# EAGLE board Circuito Irrigação (EAGLE 9.7.0)

Size 144.95 x 92.45 mm. Coordinates in mm from the lower left corner, seen from the top.
Outline: 0,0 144.95,0 144.95,92.45 0,92.45 0,0
Copper layers (1*16): Top 0.035mm / dielectric 1.5mm / Bottom 0.035mm
Design rules "default": minimum track width 6mil, minimum drill 0.35mm, track to track 6mil, track to pad 6mil, pad to pad 6mil, via to via 6mil, smd to smd 6mil, copper to edge 40mil, drill to drill 6mil, minimum pad ring 10mil, minimum via ring 8mil, stop-mask expansion 4mil, vias tented up to drill 0mil, thermal gap 10mil

## Footprints (pad centres in the part's own frame; a part is rotated, then mirrored left to right if it is on the bottom)
BATTERY-GENERIC = drill 1.118 pad 3.15 octagon: + 2.54,0; - -2.54,0
LEDRD254W60D565H860B_G = drill 0.981 pad 1.581: 1 -1.27,0; 2 1.27,0
LU-5-R = drill 0.8: 1 -6.35,-3.81; 5 3.81,-3.81; 6 6.35,-3.81; 7 6.35,3.81; 8 3.81,3.81; 12 -6.35,3.81
MOTOR = drill 1.118 pad 3.15 octagon: + 2.54,0; - -2.54,0
RESAD1016W63L850D250B = drill 0.83 pad 1.43: 1 -5.08,0; 2 5.08,0
SEN-13322 = drill 1.016 long: 1 -2.54,0; 2 0,0; 3 2.54,0
TO92 = drill 0.813 octagon: 1 -1.27,0; 2 0,1.905; 3 1.27,0
ARDUINO-UNO-R3-SHIELD = drill 1.016 pad 1.88: 3.3V 24.13,-2.54; 5V 24.13,0; A0 24.13,12.7; A1 24.13,15.24; A2 24.13,17.78; A3 24.13,20.32; A4 24.13,22.86; A5 24.13,25.4; AREF -24.13,-13.97; D2 -24.13,20.32; D3 -24.13,17.78; D4 -24.13,15.24; D5 -24.13,12.7; D6 -24.13,10.16; D7 -24.13,7.62; D8 -24.13,3.81; D9 -24.13,1.27; D10 -24.13,-1.27; D11 -24.13,-3.81; D12 -24.13,-6.35; D13 -24.13,-8.89; GND@0 24.13,2.54; GND@1 24.13,5.08; GND@2 -24.13,-11.43; IOREF 24.13,-7.62; NC 24.13,-10.16; RES 24.13,-5.08; RX -24.13,25.4; SCL -24.13,-19.05; SDA -24.13,-16.51; TX -24.13,22.86; VIN 24.13,7.62

## Placement (x,y rotation side)
BAT1  9V  [BATTERY-GENERIC]  71.96,84.19 90 top
D1  GREEN  [LEDRD254W60D565H860B_G]  114.54,54.58 270 top
K1  RELAY-SPDT_LU-5-R  [LU-5-R]  101.03,56.4 180 top
M2  MOTOR_HDR  [MOTOR]  136.7,64.41 180 top
R1  1k  [RESAD1016W63L850D250B]  82.13,67.21 0 top
R2  1k  [RESAD1016W63L850D250B]  106.33,47.79 180 top
SEN1  SEN-13322  [SEN-13322]  85.21,6.99 90 top
T1  NPN  [TO92]  87.24,58.03 120 top
U1  ARDUINO-UNO-R3-SHIELD  [ARDUINO-UNO-R3-SHIELD]  47.88,38.19 270 top

## Library data of the parts
BAT1 K1 M2 R1 R2 SEN1 U1 = Tinkercad
D1 = Tinkercad; CATEGORY: Opto-Electronic; SUB-CATEGORY: LED; VALUE: LED_GREEN
T1 = Tinkercad; CATEGORY: Transistor; SUB-CATEGORY: BJT; TYPE: NPN

## Nets
BAT1+: BAT1.+ D1.1 K1.1 K1.5
BAT1-: BAT1.- M2.- SEN1.2 T1.3 U1.GND@0 U1.GND@1 U1.GND@2
D1_C: D1.2 R2.1
M2_+: K1.6 M2.+
T1_B: R1.2 T1.2
T1_C: K1.8 R2.2 T1.1
U1_5V: SEN1.1 U1.5V
U1_A1: SEN1.3 U1.A1
U1_D12: R1.1 U1.D12

## Tracks (layer width: path | path; a pad name or v marks a point on that pad's centre or on a via)
BAT1+  (3 unrouted)
BAT1-  (6 unrouted)
D1_C  (1 unrouted)
M2_+  (1 unrouted)
T1_B  (1 unrouted)
T1_C  (2 unrouted)
U1_5V  (1 unrouted)
U1_A1  (1 unrouted)
U1_D12  (1 unrouted)